# Altium PCB ШЮГИ.758724.224 Т9М.PcbDoc
Units mil, origin at the board's own origin, x right, y up, seen from the top; angles counter-clockwise.
Board outline 354.33 x 393.7 mil, 2 copper layers (Top Layer, Bottom Layer), stack 61.855 mil thick; 3 components, 96 nets, 8 pads, 0 vias.
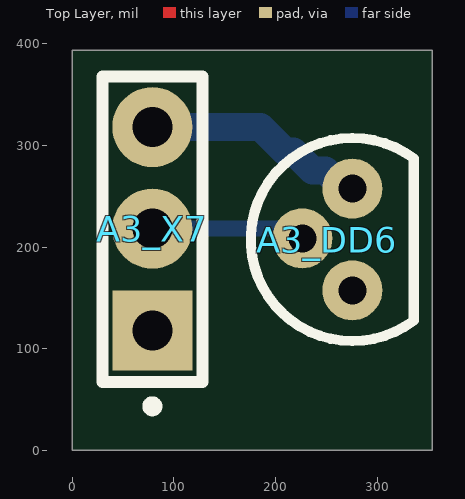
[diagram p0: Top Layer view]
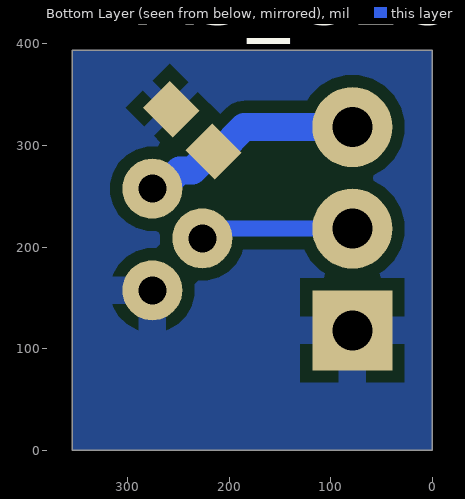
[diagram p1: Bottom Layer view, seen from below]

## Layer stack, top to bottom
Top Solder: solder mask 0.4, Solder Resist, Dk 3.5
Top Layer: signal copper 1.4
Dielectric 1: dielectric 59.0551, FR-4, Dk 4.8
Bottom Layer: signal copper 1.4
Bottom Solder: solder mask 0.4, Solder Resist, Dk 3.5

## Board outline
0,0 0,393.7 354.33,393.7 354.33,0

## Design rules (kind name [scope] priority, off if disabled: settings)
Clearance [All] p1: gap=11.81 ignorepadtopadclearanceinfootprint=TRUE
DiffPairsRouting [All] p1: maxlimit=19.68 minlimit=6 mostfreqgap=15.75 toplayer_minwidth=8 toplayer_maxwidth=19.68 toplayer_prefwidth=15.75 bottomlayer_minwidth=8 bottomlayer_maxwidth=19.68 bottomlayer_prefwidth=15.75 maxuncoupledlength=500
Height [All] p1: minheight=0 maxheight=3000 prefheight=1500
PlaneClearance [All] p1: clearance=11.81
PolygonConnect [All] p1: thpad.connectstyle=Relief thpad.reliefconductorwidth=27.56 thpad.reliefentries=4 thpad.polygonreliefangle="90 Angle" thpad.airgapwidth=11.81 smdpad.connectstyle=Relief smdpad.reliefconductorwidth=13.78 smdpad.reliefentries=4 smdpad.polygonreliefangle="90 Angle" smdpad.airgapwidth=11.81 via.connectstyle=Relief via.reliefconductorwidth=27.56 via.reliefentries=4 via.polygonreliefangle="90 Angle" via.airgapwidth=11.81
RoutingVias [All] p1: holewidth=31.5 width=55.12 viastyle="Through Hole" minholewidth=31.5 minwidth=55.12 maxholewidth=31.5 maxwidth=55.12
SolderMaskExpansion [All] p1: expansion=4 istentingtop=FALSE
SupplyNets "Schematic Supply Nets_3" [InNet('VREF')] p1: voltage=0.000
SupplyNets "Schematic Supply Nets_2" [InNet('3V3')] p2: voltage=0.000
SupplyNets "Schematic Supply Nets_1" [InNet('12VP')] p3: voltage=0.000
SupplyNets "Schematic Supply Nets" [InNet('GND')] p4: voltage=0.000
Width Width0 [InNet('3V3')or InNet('5VD') or InNet('12VP') or InNet('GND')or InNet('NetC23_1')] p1: maxlimit=27.56 minlimit=10 preferedwidth=19.68
Width Width1 [All] p2: maxlimit=19.68 minlimit=9.84 preferedwidth=15.75
27 further rules are at their usual default settings.

## Classes and differential pairs
channel class "ШЮГИ.468262.004 Э3 Л4": A8 A9 A10 A11
channel class "ШЮГИ.468262.004 Э3 Л3": A3 A4 A5 A6 A7
channel class "ШЮГИ.468262.004 Э3 Л2": A1 A2
differential pair SR: +SR_P -SR_N
differential pair D: +D_P -D_N
differential pair AC: +AC_P -AC_N

## Components (designator, comment, footprint, x,y, rotation, side; value= is the part's Value field where it differs from the comment)
A3_C18 "0603B104J500CT Thunder" C0603 236.22,314.96 r45 bottom value="0,1 uF" (schematic designator C36)
A3_DD6 "DS18B20 UTD Semiconductor Co.,Ltd" TO-92-3 275.59,157.48 r90 top (schematic designator DD6)
A3_X7 "DS1021-01-1*3SSF112" PLS-3 78.74,118.11 r90 top (schematic designator X6)

## Footprints (in the part's own frame and the unit in brackets; to place one, negate y for a bottom-side part, rotate by r counter-clockwise, add the part's x,y. Pads: shape width x height; smd on the part's side, far side on the other; paste and mask are expansions set on the pad)
C0603 [mm] "Chip Capacitor, 2-Leads, Body 1,60x0,80mm, IPC Medium Density"
  rect 1.05x0.95 smd: 1(-0.75,0) 2(0.75,0)
  body extent -0.87,-0.45 0.87,0.45, height 0.55
PLS-3 [mm]
  rect 2x2 hole 1: 1(0,0)
  round 2 hole 1: 2(2.54,0) 3(5.08,0)
  silkscreen extent -2,-1.25 6.35,1.25, body extent -1.27,-1.27 6.35,1.27, height 8.6
TO-92-3 [mm]
  round 1.5 hole 0.7: 1(0,0) 2(1.3,1.25) 3(2.54,0)
  silkscreen extent -1.27,-1.54 3.81,2.53, body extent -1.22,-1.37 3.76,2.5, height 8.5

## Part data
A3_C18: library part 0603B104J500CT, Power="50 V", Mark=104, Part Number=0603B104J500CT, Perk="±5 %", ValueBOM="0603B104J500CT Thunder", ValueSCH=0603B104J500CT, ГОСТ=Thunder, Диэлектрик=X7R, ТИП=Конденсатор
A3_DD6: library part DS18B20, Part Number=DS18B20, ValueBOM="DS18B20 UTD Semiconductor Co.,Ltd", ValueSCH=DS18B20, ГОСТ="UTD Semiconductor Co.,Ltd", Интерфейс=1-wire, ТИП=Микросхема
A3_X7: ValueBOM="DS1021-01-1*3SSF112 Connfly electronic", Part Number=DS1021-01-1*3SSF112, ValueSCH=DS1021-01-1*3SSF112, ГОСТ="Connfly electronic", ТИП=Соединитель

## Nets (pads, with @x,y where several pads share a name; then routed paths per layer and width w, separated by ;. In a path a pad name is that pad's centre, name@x,y a point inside that pad or via, vN(x,y) a via of type N, cw(c..) or ccw(c..) an arc to the next point about the centre after c; other vN are vias at no path point)
1Wire: A3_DD6.2 A3_X7.2 | length 151.6
  Bottom Layer w15.75: A3_X7.2 205.21,218.11 214.66,208.66 A3_DD6.2
3V3: A3_C18.1 A3_DD6.3 A3_X7.3 | length 222
  Bottom Layer w27.56: A3_X7.3 185.14,318.11 209.17,294.08 A3_C18.1 217.73,294.08 236.22,275.59 248.96,275.59 267.07,257.48 A3_DD6.3
5VD: 
12VP: 
AC_N: 
AC_P: 
ADC3: 
ADC4: 
BOOT0: 
C\S\: 
CLK: 
D_N: 
D_P: 
GND: A3_C18.2 A3_DD6.1 A3_X7.1
IO3: 
MISO: 
MOSI: 
NetA1_C34_1: 
NetA1_DA3_1: 
NetA1_DA3_2: 
NetA1_DA3_5: 
NetA2_C34_1: 
NetA2_DA3_1: 
NetA2_DA3_2: 
NetA2_DA3_5: 
NetC1_1: 
NetC2_1: 
NetC4_1: 
NetC4_2: 
NetC5_1: 
NetC14_1: 
NetC15_1: 
NetC16_1: 
NetC16_2: 
NetC17_1: 
NetC19_2: 
NetC23_1: 
NetC26_2: 
NetC27_1: 
NetC27_2: 
NetDA1_3: 
NetDA1_5: 
NetDA1_8: 
NetDA1_9: 
NetDA1_11: 
NetDA1_15: 
NetDA1_16: 
NetDA1_19: 
NetDA1_21: 
NetDA1_23: 
NetDA2_5: 
NetDD2_1: 
NetDD2_2: 
NetDD2_3: 
NetDD2_4: 
NetDD2_5: 
NetDD2_6: 
NetDD2_7: 
NetDD2_9: 
NetDD2_10: 
NetDD2_11: 
NetDD2_12: 
NetDD3_1: 
NetDD3_3: 
NetDD3_14: 
NetDD4_3: 
NetDD4_9: 
NetDD4_11: 
NetDD4_18: 
NetDD4_19: 
NetDD4_22: 
NetG1_1: 
NetG1_3: 
NetG1_6: 
NetHG1_3: 
NetHG1_16: 
NetHL1_1: 
NetHL2_1: 
NetHL3_1: 
NetHL4_1: 
NetL3_2: 
NetR2_2: 
NetR25_2: 
NetR26_2: 
NetR27_2: 
NetR28_2: 
NetR41_2: 
NetR42_2: 
R\S\T\: 
Rx: 
SCL: 
SDA: 
SR_N: 
SR_P: 
Tx: 
VREF: 

## Polygon pours and split planes (outlines as drawn)
GND on Bottom Layer "GND_L02_P000" (solid, remove dead copper, pour order 0): 0,0 0,393.7 354.33,393.7 354.33,0

## Silkscreen, mask and mechanical layers (free items; w line width, h text height)
Mechanical 1:
  the board outline again, w3.94